# EAGLE board RS232_2xNPN_6Pin_New (EAGLE 7.2.0)
RS232 Adapter using two NPN Transistors
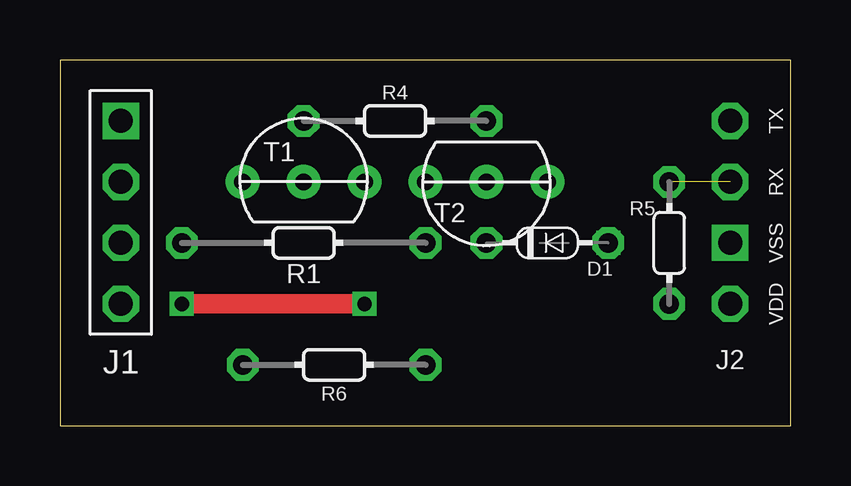
[diagram p0: board, top side]
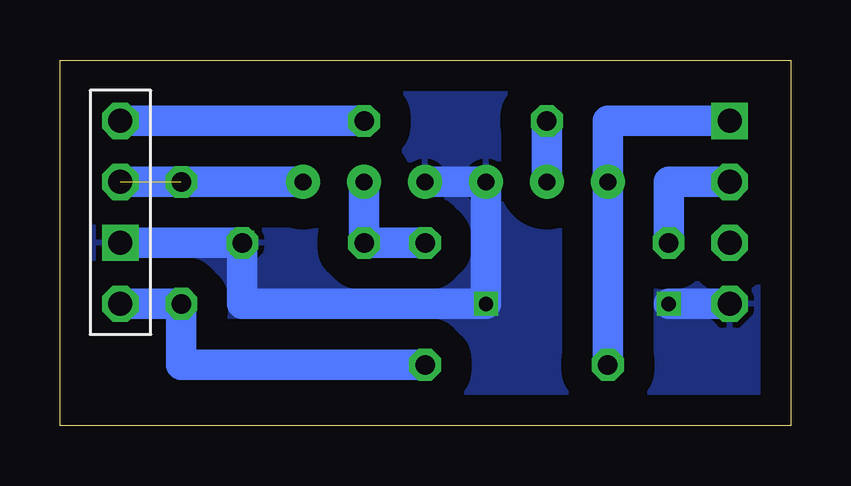
[diagram p1: board, bottom side, seen from below]

Size 30.46 x 15.24 mm. Coordinates in mm from the lower left corner, seen from the top.
Outline: 0,0 30.46,0 30.46,15.24 0,15.24 0,0
Copper layers (1*16): Top 0.035mm / dielectric 1.5mm / Bottom 0.035mm
Design rules "default": minimum track width 10mil, minimum drill 24mil, track to track 8mil, track to pad 8mil, pad to pad 8mil, via to via 8mil, smd to smd 8mil, copper to edge 40mil, drill to drill 8mil, minimum pad ring 10mil, minimum via ring 8mil, stop-mask expansion 4mil, vias tented up to drill 0mil, thermal gap 10mil
Net classes: 0 default: width 0.813 mm

## Footprints (pad centres in the part's own frame; a part is rotated, then mirrored left to right if it is on the bottom)
DO34-5 = drill 0.813 octagon: A 2.54,0; C -2.54,0
RS232-4PIN-NEW-L = drill 1 square: 1 0,-3.81 | drill 1 octagon: 2 0,-1.27; 3 0,1.27; 4 0,3.81
PIC-UART-X = drill 1 octagon: 17 0,-3.81; 18 0,-1.27; 20 0,3.81 | drill 1 square: 19 0,1.27
0202/10 = drill 0.813 octagon: 1 -5.08,0; 2 5.08,0
0202/7 = drill 0.813 octagon: 1 -3.81,0; 2 3.81,0
0202/5-V = drill 0.813 octagon: 1 0,2.54; 2 0,-2.54
TO92-CBE = drill 0.7 pad 1.422: B 0,0; C 0,2.54; E 0,-2.54

## Placement (x,y rotation side)
D1  1N4148  [DO34-5]  20.32,7.62 0 top
J1  COMPORT-4PIN-NEW-L  [RS232-4PIN-NEW-L]  2.54,8.89 180 top
J2  PIC-UART-X  [PIC-UART-X]  27.94,8.89 180 top
R1  4.7kΩ  [0202/10]  10.16,7.62 180 top
R4  10kΩ  [0202/7]  13.97,12.7 180 top
R5  1kΩ  [0202/5-V]  25.4,7.62 0 top
R6  1kΩ  [0202/7]  11.43,2.54 0 top
T1  BC547  [TO92-CBE]  10.16,10.16 90 top
T2  BC547  [TO92-CBE]  17.78,10.16 270 top

## Library data of the parts
D1 = d
J1 J2 = pinconn
R1 R4-R6 = r
T1 T2 = t

## Nets
+5V: J2.20 R5.2 R6.2
GND: D1.A J1.4 J2.19 T1.E T2.E
N$1: J2.18 R5.1 T2.C
N$2: D1.C R1.1 T2.B
N$4: J2.17 R4.1
N$5: R4.2 T1.B
RXD: J1.1 R6.1 T1.C
TXD: J1.2 R1.2

## Tracks (layer width: path | path; a pad name or v marks a point on that pad's centre or on a via)
+5V
  Bottom 1.27: R6.2 25.4,2.54 R5.2 J2.20
GND  (via drill 0.6)
  Top 0.813: v5.08,5.08 v12.7,5.08
  Bottom 1.27: J2.19 D1.A 22.86,5.08 v12.7,5.08 T1.E T2.E | J1.4 v5.08,5.08
  other vias: 12.7,10.16 22.86,7.62
  pour Bottom (isolate 1.27): 1.27,15.24 1.27,1.27 29.21,1.27 29.21,15.24
N$1  (1 unrouted)
  Bottom 1.27: T2.C J2.18
N$2
  Bottom 1.27: T2.B D1.C R1.1
N$4
  Bottom 1.27: R4.1 J2.17
N$5
  Bottom 1.27: T1.B R4.2
RXD
  Bottom 1.27: R6.1 T1.C 7.62,12.7 J1.1
TXD
  Bottom 1.27: R1.2 5.08,10.16 J1.2